# Altium PCB PCB_power.PcbDoc (part 1 of 2)
Units mil, origin at the board's own origin, x right, y up, seen from the top; angles counter-clockwise.
Board outline 6691.63 x 4180 mil, 4 copper layers (Top Layer, PWR Plane, GND Plane, Bottom Layer), stack 43.624 mil thick; 88 components, 48 nets, 304 pads, 150 vias.
Unrouted connection lines stored in the file: 3.
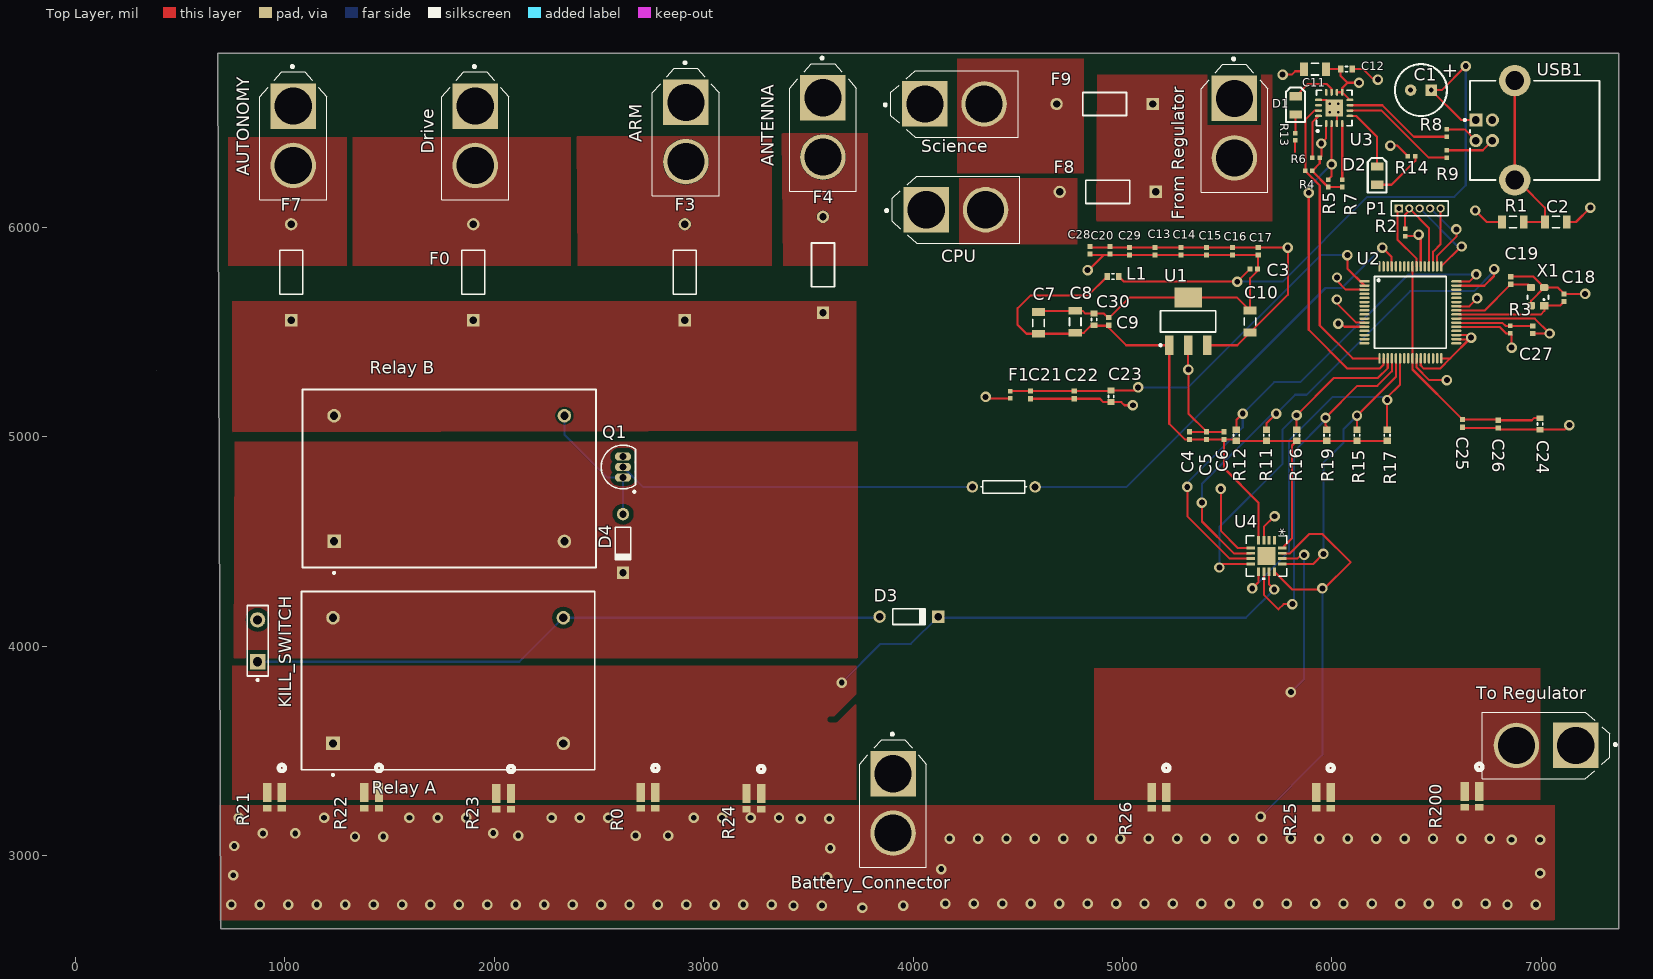
[diagram p0: Top Layer view]
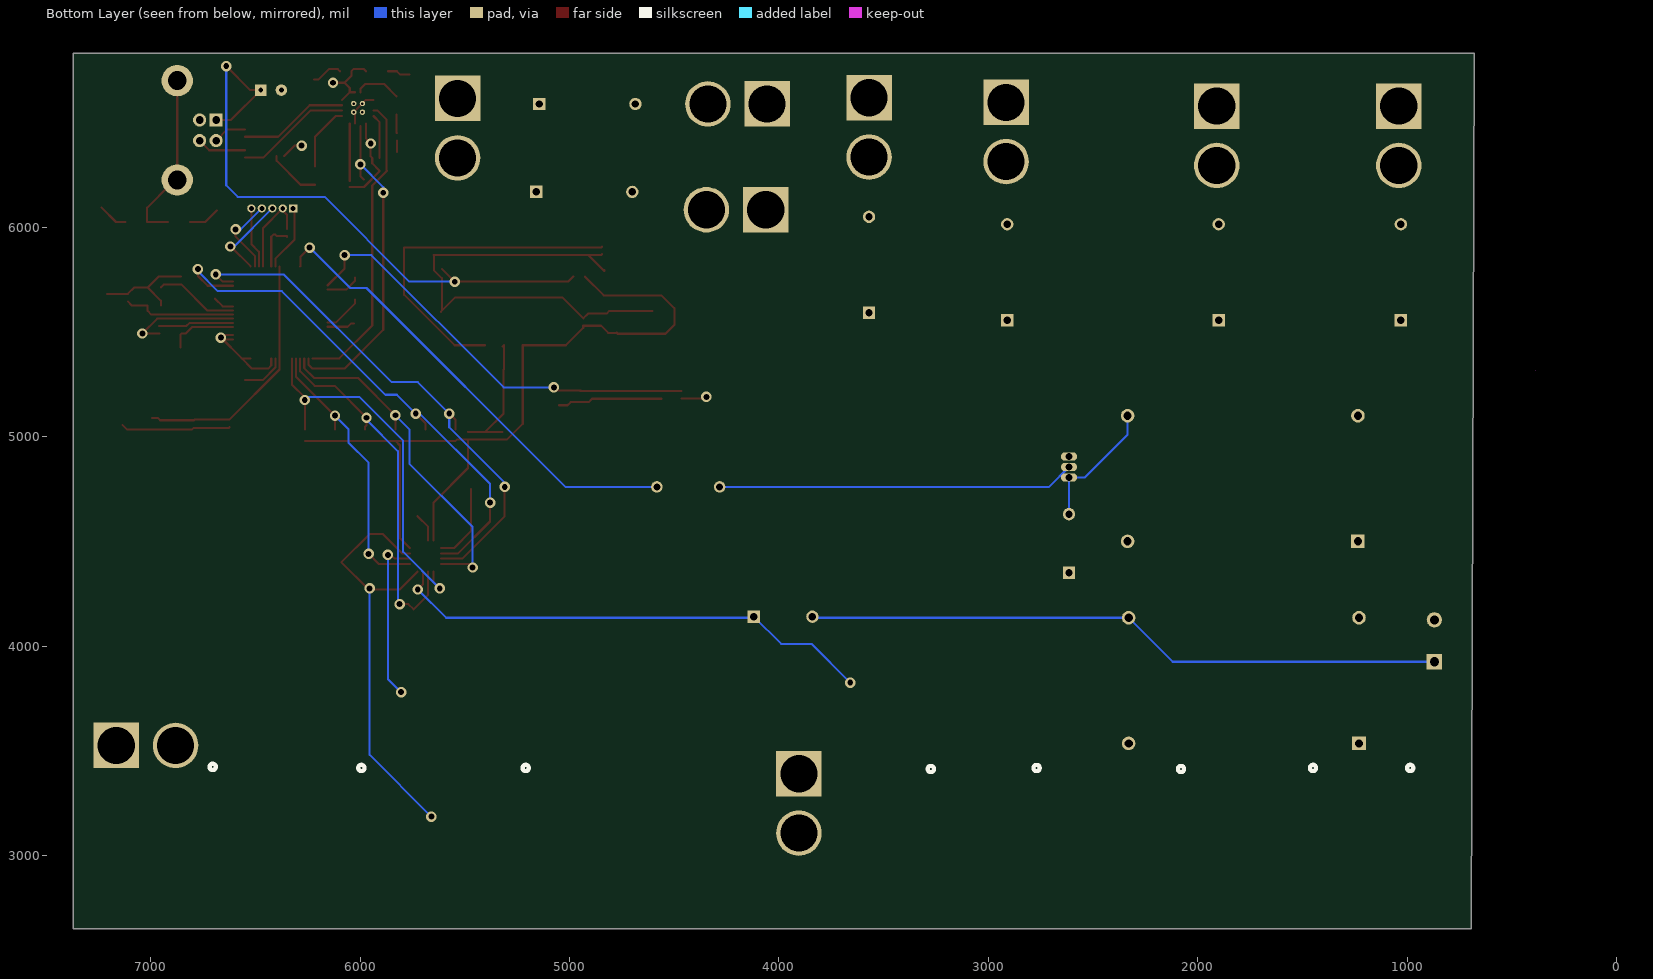
[diagram p1: Bottom Layer view, seen from below]
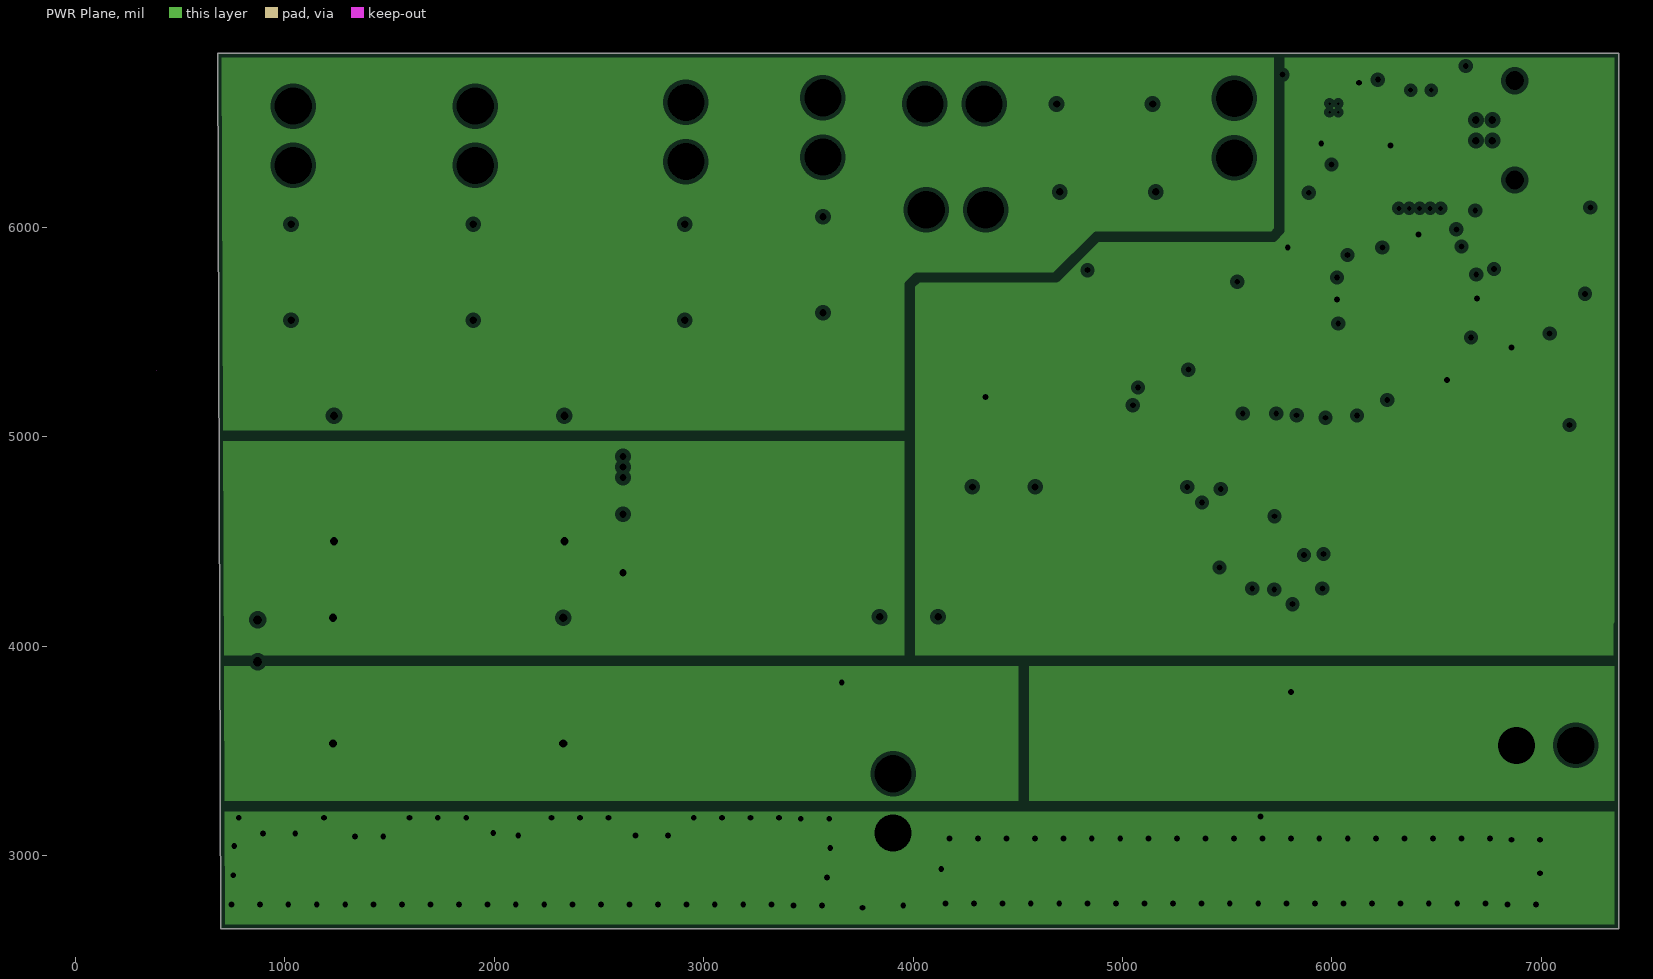
[diagram p2: PWR Plane, clearances drawn from the general rule]
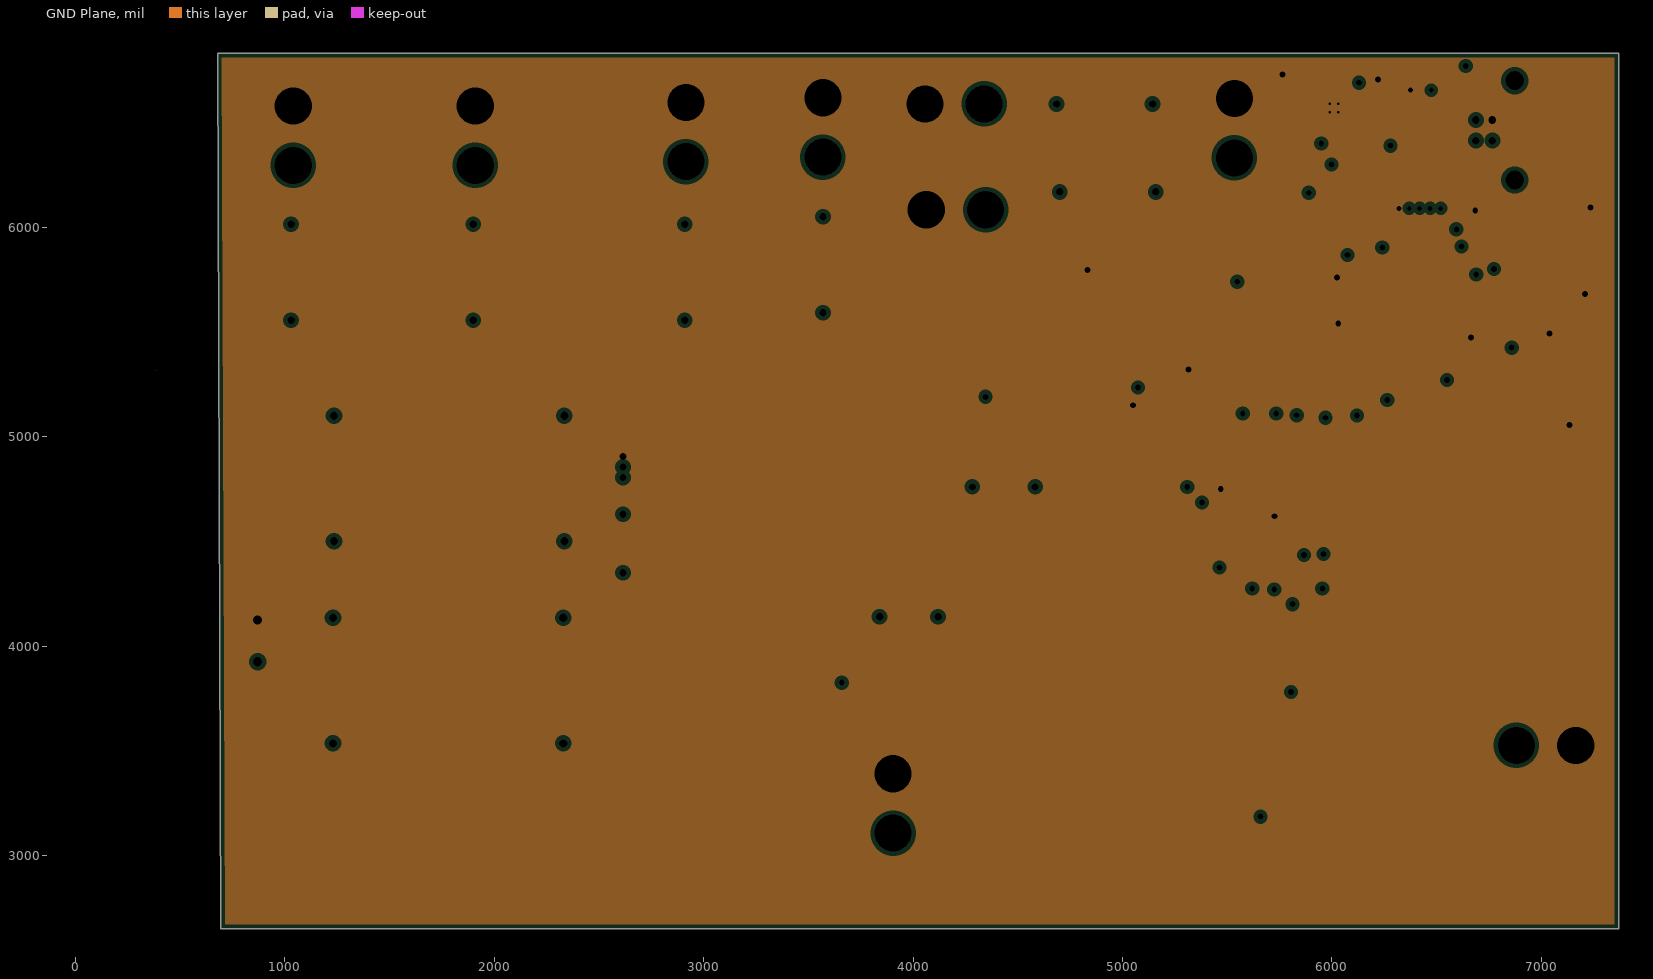
[diagram p3: GND Plane, clearances drawn from the general rule]
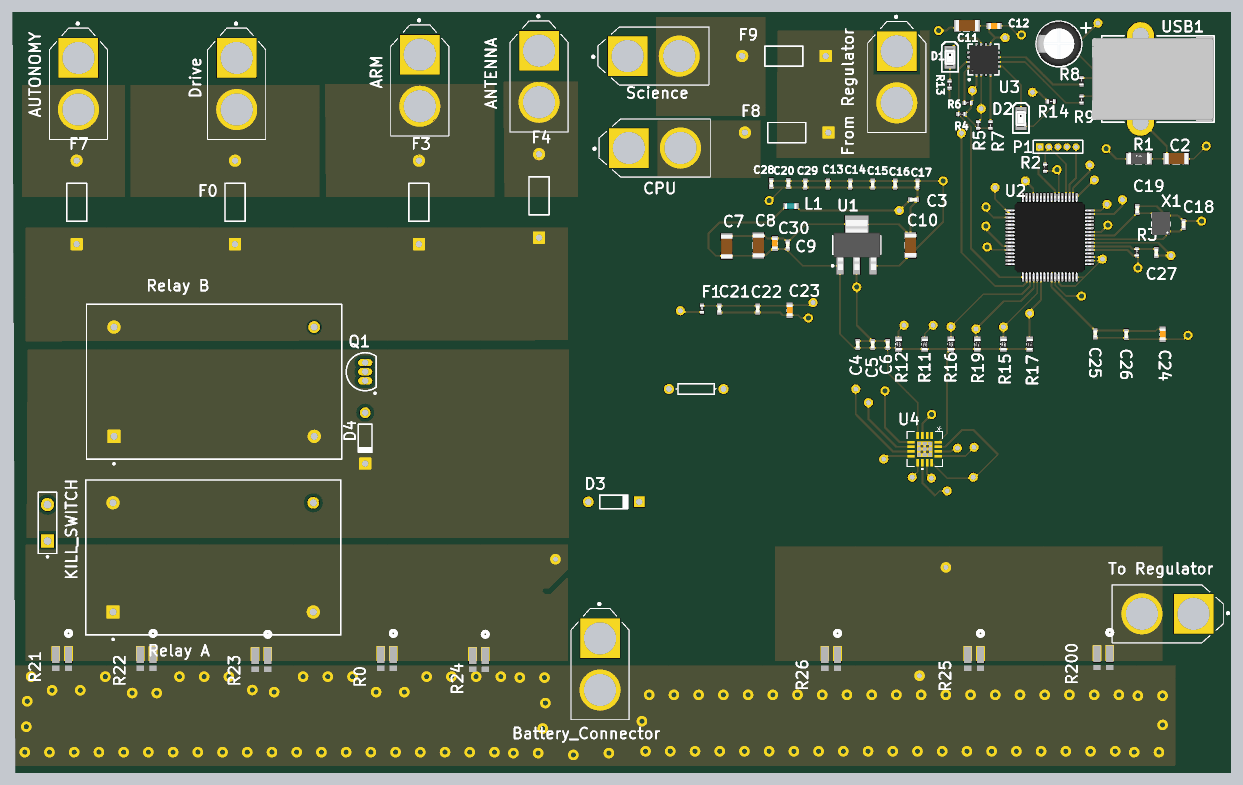
[diagram p4: 3D render of the assembled board from above, using the file's embedded part models]

## Layer stack, top to bottom
Top Solder: solder mask 0.4, Solder Resist, Dk 3.5
Top Layer: signal copper 2.7559
Dielectric 1: dielectric 12.6, FR-4, Dk 4.8
PWR Plane: plane copper 2.7559, net (Multiple Nets)
Dielectric 2: dielectric 10, Dk 4.2
GND Plane: plane copper 2.7559, net GND
Dielectric 3: dielectric 10, Dk 4.2
Bottom Layer: signal copper 2.7559
Bottom Solder: solder mask 0.4, Solder Resist, Dk 3.5

## Board outline
678.37,6830 7370,6830 7370,2650 693.44,2650
cut-out: 385,5315
cut-out: 8064.41,6636.2
cut-out: 5920,935

## Design rules (kind name [scope] priority, off if disabled: settings)
Clearance Clearance_5 [InNamedPolygon('Top Layer-IN-1')] p1: gap=10 ignorepadtopadclearanceinfootprint=FALSE
Clearance Clearance_4 [InNamedPolygon('Top Layer-RELAY_B')] p2: gap=10 ignorepadtopadclearanceinfootprint=FALSE except(0: Arc-Hole Track-Hole SMDPad-Hole THPad-Hole Via-Hole Fill-Hole Poly-Hole Region-Hole Text-Hole)
Clearance Clearance_3 [InNamedPolygon('Top Layer-IN-1')] p3: gap=10 ignorepadtopadclearanceinfootprint=FALSE
Clearance Clearance_2 [InNamedPolygon('Top Layer-12V')] p4: gap=20 ignorepadtopadclearanceinfootprint=FALSE
Clearance Clearance_1 [InNamedPolygon('Top Layer-RELAY_A')] p5: gap=19.68 ignorepadtopadclearanceinfootprint=FALSE
Clearance [All] p6 off: gap=7.87 ignorepadtopadclearanceinfootprint=FALSE
PlaneClearance [All] p1: clearance=20
PlaneConnect [All] p1: planeconnectstyle=Relief reliefexpansion=20 reliefentries=4 reliefconductorwidth=10 reliefairgap=10
PolygonConnect [All] p1: connectstyle=Direct reliefconductorwidth=10 reliefentries=4 polygonreliefangle="90 Angle" airgapwidth=10
RoutingVias [All] p1: holewidth=28 width=50 viastyle="Through Hole" minholewidth=28 minwidth=50 maxholewidth=28 maxwidth=50
SolderMaskExpansion [All] p1: expansion=4
Width [All] p1: maxlimit=10 minlimit=10 preferedwidth=10
28 further rules are at their usual default settings.

## Components (designator, comment, footprint, x,y, rotation, side; value= is the part's Value field where it differs from the comment)
ANTENNA "XT60-M" AMASS_XT60-M 3570,6476.73 r270 top
ARM "XT60-M" AMASS_XT60-M 2915,6455 r270 top
AUTONOMY "XT60-M" AMASS_XT60-M 1040,6436.73 r270 top
Battery_Connector "XT60-M" AMASS_XT60-M 3905,3248.27 r270 top
C1 "100uF" CapAlu6.3mmx12.5mm 6425.79,6655 r0 top
C2 "10nF" CAP_1206 7070,6025 r180 top
C3 "10nF" CAP_0402_M 5626.89,5800 r180 top
C4 "100nF" CAP_0402_M 5320,5005 r270 top
C5 "2.2uF" CAP_0402_M 5402.46,5005 r270 top
C6 "2.2uF" CAP_0402_M 5485,5005 r270 top
C7 "100uF" CAP_1206 4600,5543.7 r90 top
C8 "100uF" CAP_1206 4775,5548.7 r90 top
C9 "1uF" CAP_0402_M 4935,5550 r270 top
C10 "100uF" CAP_1206 5610,5550 r90 top
C11 "100uF" CAP_1206 5920,6755 r180 top
C12 "10uF" CAP_0603 6070,6755 r0 top
C13 "10nF" CAP_0402_M 5156.23,5885 r90 top
C14 "100nF" CAP_0402_M 5279.34,5885 r90 top
C15 "100nF" CAP_0402_M 5402.46,5885 r90 top
C16 "10nF" CAP_0402_M 5525.57,5885 r90 top
C17 "100nF" CAP_0402_M 5648.68,5885 r90 top
C18 "13pF" CAP_0402_M 7110,5663.86 r270 top
C19 "13pF" CAP_0402_M 6855,5745.75 r270 top
C20 "100nF" CAP_0402_M 4940,5890 r90 top
C21 "10nF" CAP_0402_M 4560.28,5199.01 r90 top
C22 "100nF" CAP_0402_M 4770.28,5199.01 r90 top
C23 "10uF" CAP_0603 4946.45,5192.56 r90 top
C24 "2.2uF" CAP_0603 6995,5060.71 r90 top
C25 "1uF" CAP_0402_M 6625,5063.15 r90 top
C26 "100nF" CAP_0402_M 6795,5060.04 r90 top
C27 "100nF" CAP_0402_M 6960,5510.75 r90 top
C28 "100nF" CAP_0402_M 4845,5890 r90 top
C29 "100nF" CAP_0402_M 5033.11,5885 r90 top
C30 "100nF" CAP_0603 4865,5560 r270 top
CPU "XT60-M" AMASS_XT60-M 4205,6083.7 r0 top
D1 "Led Red" "TOPLED 0805" 5827.16,6582.17 r90 top
D2 "Led Red" "TOPLED 0805" 6216.61,6246.5 r90 top
D3 "Diode 1N4148" DO-35 3980.24,4140 r0 top
D4 "Diode 1N4148" DO-35 2615,4490 r270 top
Drive "XT60-M" AMASS_XT60-M 1909.3,6436.73 r270 top
F0 "50A" PIN-W2/E2.8 1900,5785 r90 top
F1 "550mA" RES_0402_M 4465,5200 r90 top
F3 "50A" PIN-W2/E2.8 2910,5785 r90 top
F4 "15A" PIN-W2/E2.8 3570,5820.67 r90 top
F7 "25A" PIN-W2/E2.8 1030,5785 r90 top
F8 "6 A" PIN-W2/E2.8 4930,6168.7 r180 top
F9 "20 A" PIN-W2/E2.8 4915,6588.7 r180 top
"From Regulator" "XT60-M" AMASS_XT60-M 5535,6473.27 r270 top
KILL_SWITCH "SW-PB" SPST-2 870,4025 r90 top
L1 "200R" IND_0603 4955,5765 r180 top
P1 "MHDR1X5" MHDR1X5 6320,6090 r0 top
Q1 "NPN" TO-226-AA 2615,4855 r0 top
R0 "WSK06125L000FEA" RES_WSK0612_VIS 2769.68,3225 r270 top
R1 "1M" RES_1206 6865,6025 r0 top
R2 "10k" RES_0402_M 6350,5975 r90 top
R3 "10k" RES_0402_M 6853.11,5511.14 r90 top
R4 "10k" RES_0402_M 5890,6270 r0 top
R5 "10k" RES_0402_M 5982.16,6210 r270 top
R6 "10k" RES_0402_M 5925,6331.54 r0 top
R7 "10k" RES_0402_M 6050,6210 r270 top
R8 "27" RES_0402_M 6550,6450 r270 top
R9 "27" RES_0402_M 6550,6350 r270 top
R11 "10k" RES_0603 5688.28,5006.57 r90 top
R12 "10k" RES_0603 5544.22,5006.58 r90 top
R13 "120" RES_0402_M 5825,6432.28 r270 top
R14 "120" RES_0402_M 6381.61,6339.8 r180 top
R15 "10k" RES_0603 6120.44,5006.57 r90 top
R16 "10k" RES_0603 5832.33,5006.57 r90 top
R17 "10k" RES_0603 6264.49,5006.57 r90 top
R19 "10k" RES_0603 5976.38,5006.57 r90 top
R21 "WSK06125L000FEA" RES_WSK0612_VIS 985.48,3225.16 r270 top
R22 "WSK06125L000FEA" RES_WSK0612_VIS 1449.69,3225.16 r270 top
R23 "WSK06125L000FEA" RES_WSK0612_VIS 2080,3220.16 r270 top
R24 "WSK06125L000FEA" RES_WSK0612_VIS 3274.69,3220.16 r270 top
R25 "WSK06125L000FEA" RES_WSK0612_VIS 5994.68,3225.16 r270 top
R26 "WSK06125L000FEA" RES_WSK0612_VIS 5209.69,3225.16 r270 top
R200 "WSK06125L000FEA" RES_WSK0612_VIS 6704.68,3230.16 r270 top
"Relay A" "J115F11AH24VDCS61.5U" MODULE4 1780,3835 r0 top
"Relay B" "J115F11AH24VDCS61.5U" MODULE4 1785,4800 r0 top
Science "XT60-M" AMASS_XT60-M 4198.27,6588.7 r0 top
"To Regulator" "XT60-M" AMASS_XT60-M 7023.27,3525 r180 top
U1 "MCP1825S-3302E/DB" SOT230P700X180-4N 5314.17,5550.75 r90 top
U2 "TM4C123GH6PMI" TSQFP50P1200X1200X120-64N 6227.87,5813.07 r0 top
U3 "FT230XQ" QFN65P400X400X80_HS-17N 6011.61,6569.8 r90 top
U4 "INA3221AQRGVRQ1" RGV16_2P16X2P16_ 5688.28,4430 r270 top
USB1 "USB type-B jack" USB2.5-2H4E 6727.84,6462.99 r0 top
X1 "CRYSTAL 16MHZ" CRYSTAL_3.2x2.5 7015,5625.75 r180 top
? "" AXIAL-0.3 4433.35,4760 r180 top value=10K

## Footprints (in the part's own frame and the unit in brackets; to place one, negate y for a bottom-side part, rotate by r counter-clockwise, add the part's x,y. Pads: shape width x height; smd on the part's side, far side on the other; paste and mask are expansions set on the pad)
AMASS_XT60-M [mm]
  rect 5.516x5.516 hole 4.5: 1(-3.6,0)
  round 5.516 hole 4.5: 2(3.6,0)
  silkscreen extent -8.55,-4.05 7.75,4.05
AXIAL-0.3 [mm] "Axial Device, Thru-Hole; 2 Leads; 0.3 in Pin Spacing"
  round 1.4 hole 0.85: 1(-3.81,0) 2(3.81,0)
  silkscreen extent -2.77,-0.76 2.77,0.76
CAP_0402_M [mm] "Chip Capacitor, 2-Leads, Body 1.00x0.50mm, IPC Medium Density"
  rect 0.62x0.62 smd: 1(-0.46,0) 2(0.46,0)
  body extent -0.5,-0.26 0.5,0.27, height 0.36
CAP_0603 [mm] "Chip Capacitor, 2-Leads, Body 1,6x0,8mm, IPC High Density"
  rect 0.7x0.85 smd: 1(-0.7,0) 2(0.7,0)
  silkscreen extent -0.15,-0.33 0.15,0.33, body extent -0.8,-0.42 0.8,0.38, height 0.7
CAP_1206 [mm] "Chip Capacitor, 2-Leads, Body 3,1x1,6mm, IPC High Density"
  rect 0.95x1.6 smd: 1(-1.325,0) 2(1.325,0)
  silkscreen extent -0.45,-0.7 0.45,0.7, body extent -1.63,-0.82 1.57,0.78, height 1.6
CapAlu6.3mmx12.5mm [mm] "Capacitor Aluminum 6.3mm OD"
  rect 1.4x1.4 hole 0.6: 1(1.25,0)
  round 1.4 hole 0.6: 2(-1.25,0)
  silkscreen extent -3.15,-3.15 3.15,3.15, body extent -3.15,-3.11 3.15,3.19, height 12
CRYSTAL_3.2x2.5 [mm]
  rect 1x0.9 smd: 1(0,0)
  rrect50% 1x0.9 smd: 2(0,-2.2) 3(1.6,-2.2) 4(1.6,0)
  silkscreen extent -0.51,-1.27 2.03,-0.69, body extent -0.5,-2.7 2,0.5, height 0.93
DO-35 [mm] "Diode, Axial; Body 3.8 x 1.9 mm (LxDia. max), Lead Dia. 0.53 mm (max)"
  round 1.5 hole 0.9: 1(-3.55,0)
  rect 1.5x1.5 hole 0.9: 2(3.55,0)
  silkscreen extent -1.95,-0.95 2.05,0.95
IND_0603 [mm]
  rect 0.7x0.85 smd: 1(-0.7,0) 2(0.7,0)
  silkscreen extent -0.15,-0.32 0.15,0.32, body extent -0.74,-0.4 0.86,0.4, height 0.95
MHDR1X5 [mm] "Connector; Header; 5 Position"
  rect 1x1 hole 0.6: 1(0,0)
  round 1 hole 0.6: 2(1.27,0) 3(2.54,0) 4(3.81,0) 5(5.08,0)
  silkscreen extent -0.9,-0.9 5.98,0.9
MODULE4 [mm] "DIP; 4 Round Pins; Row Space 27.94 mm; Pitch 15.24 mm"
  rect 1.65x1.65 hole 1: 1(-13.97,-7.62)
  round 1.65 hole 1: 2(-13.97,7.62) 3(13.97,-7.62) 4(13.97,7.62)
  silkscreen extent -17.8,-11.57 17.8,10.8, body extent -17.8,-10.8 17.8,10.8, height 14
PIN-W2/E2.8 [mm] "Thru-Hole; 2 Leads"
  rect 1.5x1.5 hole 0.9: 1(-5.825,0)
  round 1.5 hole 0.9: 2(5.825,0)
  silkscreen extent -2.65,-1.4 2.65,1.4
QFN65P400X400X80_HS-17N [mm] "QFN, 16-Leads, Body 4.00x4.00mm, Pitch 0.65mm, Thermal Pad 2.08x2.08mm, IPC Medium Density"
  oval 0.85x0.3 smd: 1(-1.9,0.975) 2(-1.9,0.325) 3(-1.9,-0.325) 4(-1.9,-0.975) 9(1.9,-0.975) 10(1.9,-0.325) 11(1.9,0.325) 12(1.9,0.975)
  oval 0.3x0.85 smd: 5(-0.975,-1.9) 6(-0.325,-1.9) 7(0.325,-1.9) 8(0.975,-1.9) 13(0.975,1.9) 14(0.325,1.9) 15(-0.325,1.9) 16(-0.975,1.9)
  round 0.66 hole 0.305: 17(-0.516,-0.493) 17(-0.516,0.567) 17(0.538,-0.493) 17(0.538,0.567)
  rect 2.08x2.08 smd: 17(0,0)
  silkscreen extent -2.92,-2.15 2.15,2.15, body extent -2,-2 2,2, height 0.92
RES_0402_M [mm] "Chip Resistor, 2-Leads, Body 1.00x0.50mm, IPC Medium Density"
  rect 0.55x0.55 smd: 1(-0.45,0) 2(0.45,0)
  body extent -0.52,-0.3 0.52,0.3, height 0.34
RES_0603 [mm] "Chip Resistor, 2-Leads, Body 1,6x0,8mm, IPC High Density"
  rect 0.75x0.9 smd: 1(-0.675,0) 2(0.675,0)
  silkscreen extent -0.1,-0.35 0.1,0.35, body extent -0.82,-0.48 0.72,0.38, height 0.45
RES_1206 [mm] "Chip Resistor 2-Leads, Body 3,1x1,6mm, IPC High Density"
  rect 0.95x1.6 smd: 1(-1.325,0) 2(1.325,0)
  silkscreen extent -0.45,-0.7 0.45,0.7, body extent -1.59,-0.76 1.61,0.84, height 1
RES_WSK0612_VIS [mil]
  rect 30x40 smd paste+0 mask+0: 1(0,0) 2(0,-69.68)
  rect 90x40 smd: 3(-74.84,0) 4(-74.84,-69.68)
  silkscreen extent -207,-15 -178,15, body extent 0,0 10,10, height 10
RGV16_2P16X2P16_ [mm]
  rect 1x0.35 smd paste-0.175 mask+0: 1(-1.9,0.975) 2(-1.9,0.325) 3(-1.9,-0.325) 4(-1.9,-0.975) 9(1.9,-0.975) 10(1.9,-0.325) 11(1.9,0.325) 12(1.9,0.975)
  rect 0.35x1 smd paste-0.175 mask+0: 5(-0.975,-1.9) 6(-0.325,-1.9) 7(0.325,-1.9) 8(0.975,-1.9) 13(0.975,1.9) 14(0.325,1.9) 15(-0.325,1.9) 16(-0.975,1.9)
  rect 2.16x2.16 smd paste-1.067 mask-1.067: 17(0,0)
  silkscreen extent -2.46,-2.46 2.91,2.46, body extent 0,0 0.25,0.25, height 0.25
SOT230P700X180-4N [mm] "SOT223, 4-Leads, Body 6,7x7,3mm (max), Pitch 2,30mm, IPC Medium Density"
  rect 2.4x1 smd: 1(-2.9,2.3) 2(-2.9,0) 3(-2.9,-2.3)
  rect 2.4x3.3 smd: 4(2.9,0)
  silkscreen extent -3.02,-3.35 1.3,3.47, body extent -3.5,-3.3 3.5,3.2, height 1.69
SPST-2 [mm] "Switch; 2 Leads"
  rect 1.85x1.85 hole 1.1: 1(-2.54,0)
  round 1.85 hole 1.1: 2(2.54,0)
  silkscreen extent -4.89,-1.27 4.28,1.27
TO-226-AA [mm] "TO, Flat Index; 3 In-Line, Axial Leads; Body Dia. 4.8mm; Leads 0.55 x 0.51 mm (max)"
  oval 2x1 hole 0.9: 1(0,-1.27) 2(0,0) 3(0,1.27)
  silkscreen extent -2.65,-3.13 1.52,2.65, body extent -2.65,-2.66 1.52,2.66, height 5.33
"TOPLED 0805" [mm]
  rect 1x1.5 smd: 1(-1.1,0) 2(1.1,0)
  silkscreen extent -2.03,-1.14 2.16,1.14, body extent -1.2,-0.74 1.2,0.76, height 1.45
TSQFP50P1200X1200X120-64N [mm] "TSQFP, 64-Leads, Body 12,0x12,0mm (max), Pitch 0,50mm, IPC Medium Density"
  rect 1.25x0.3 smd: 1(-1.825,-1.825)
  oval 1.25x0.3 smd: 2(-1.825,-2.325) 3(-1.825,-2.825) 4(-1.825,-3.325) 5(-1.825,-3.825) 6(-1.825,-4.325) 7(-1.825,-4.825) 8(-1.825,-5.325) 9(-1.825,-5.825) 10(-1.825,-6.325) 11(-1.825,-6.825) 12(-1.825,-7.325) 13(-1.825,-7.825) 14(-1.825,-8.325) 15(-1.825,-8.825) 16(-1.825,-9.325) 33(9.325,-9.325) 34(9.325,-8.825) 35(9.325,-8.325) 36(9.325,-7.825) 37(9.325,-7.325) 38(9.325,-6.825) 39(9.325,-6.325) 40(9.325,-5.825) 41(9.325,-5.325) 42(9.325,-4.825) 43(9.325,-4.325) 44(9.325,-3.825) 45(9.325,-3.325) 46(9.325,-2.825) 47(9.325,-2.325) 48(9.325,-1.825)
  oval 0.3x1.25 smd: 17(0,-11.15) 18(0.5,-11.15) 19(1,-11.15) 20(1.5,-11.15) 21(2,-11.15) 22(2.5,-11.15) 23(3,-11.15) 24(3.5,-11.15) 25(4,-11.15) 26(4.5,-11.15) 27(5,-11.15) 28(5.5,-11.15) 29(6,-11.15) 30(6.5,-11.15) 31(7,-11.15) 32(7.5,-11.15) 49(7.5,0) 50(7,0) 51(6.5,0) 52(6,0) 53(5.5,0) 54(5,0) 55(4.5,0) 56(4,0) 57(3.5,0) 58(3,0) 59(2.5,0) 60(2,0) 61(1.5,0) 62(1,0) 63(0.5,0) 64(0,0)
  silkscreen extent -0.6,-9.92 8.1,-1.23, body extent -2.05,-11.38 9.53,0.2, height 1
USB2.5-2H4E [mm] "Connector; USB1.1, Type B, Thru-Hole; 4 Position; Right Angle"
  rect 1.6x1.6 hole 0.92: 1(-1,1.25)
  round 1.6 hole 0.92: 2(-1,-1.25) 3(1,-1.25) 4(1,1.25)
  round 3.8 hole 2.3: 5(3.71,6.02) 6(3.71,-6.02)
  silkscreen extent -2.47,-6.02 13.99,6.02, body extent -3.03,-6 13.97,6, height 10.9

## Part data
ANTENNA ARM AUTONOMY Battery_Connector CPU Drive "From Regulator" Science "To Regulator": "Plug; DC supply; XT60; male; PIN: 2; for cable; soldered; 30A; 500V", Package="Package Analog Devices", Availability=Unavailable, MF=AMASS, MP=XT60-M, Price=None, SnapEDA_Link=https://www.snapeda.com/parts/XT60-M/AMASS/view-part/2883912/?ref=snap
C1: library part 100uF_35v_6.3x12.5, "Capacitor 35v 100uF 6.3mm", Capacitance=100µF, ESR (Equivalent Series Resistance)=-, Lifetime @ Temp.="5000 Hrs @ 105°C", Manufacturer=Nichicon, Manufacturer Part Number=UHV1V101MED, Operating Temperature="-40°C ~ 105°C", Package / Case="Radial, Can", Ripple Current="220mA @ 120Hz", Supplier Part Number 1=493-13394-ND, Tolerance=±20%, Voltage Rating=35V, Applications="General Purpose", Category=Capacitors, ComponentLink1Description=http://nichicon-us.com/english/products/pdfs/e-uhv.pdf, ComponentLink1URL=http://nichicon-us.com/english/products/pdfs/e-uhv.pdf, Height - Seated (Max)="0.492\" (12.50mm)", Impedance="100 mOhm", Lead Spacing="0.098\" (2.50mm)", Mounting Type="Through Hole", Packaging=Bulk, Polarization=Polar, Pricing 1="1=0.46, 10=0.32, 25=0.262, 50=0.224, 100=0.1919, 250=0.15992, 500=0.14394, 1000=0.12155, 2500=0.11515 (CAD)", RoHS="RoHS Compliant", Size / Dimension="0.248\" Dia (6.30mm)", Stock 1=5561, Supplier 1=Digi-Key, Surface Mount Land Size=-
C2: library part 10nF_500V_1206, "CAP CER 10000PF 500V X7R 1206", Capacitance=10000pF, Manufacturer="Samsung Electro-Mechanics America, Inc", Manufacturer Part Number=CL31B103KGFNNNE, Operating Temperature="-55°C ~ 125°C", Package / Case="1206 (3216 Metric)", Ratings=-, Supplier Part Number 1=1276-3076-1-ND, Temperature Coefficient=X7R, Tolerance=±10%, Voltage - Rated=500V, Applications="General Purpose", Category=Capacitors, ComponentLink1Description=http://www.samsungsem.com/kr/front/downloadcms.do?path=/kr/support/product-search/mlcc/__icsFiles/afieldfile/2014/11/05&fileName=S_CL31B103KGFNNNE.pdf, ComponentLink1URL=http://www.samsungsem.com/kr/front/downloadcms.do?path=/kr/support/product-search/mlcc/__icsFiles/afieldfile/2014/11/05&fileName=S_CL31B103KGFNNNE.pdf, Features=-, Height - Seated (Max)=-, Lead Spacing=-, Lead Style=-, Mounting Type="Surface Mount, MLCC", Packaging="Cut Tape (CT)", Pricing 1="1=0.34, 10=0.28, 25=0.192, 100=0.1398, 500=0.09266, 1000=0.08216 (CAD)", RoHS="RoHS Compliant", Size / Dimension="0.126\" L x 0.063\" W (3.20mm x 1.60mm)", Stock 1=9075, Supplier 1=Digi-Key, Thickness (Max)="0.055\" (1.40mm)"
C3 C13 C16 C21: library part 10nF_50V_0402, "CAP CER 10000PF 50V 10% X7R 0402", Capacitance=10000pF, Manufacturer=Kemet, Manufacturer Part Number=C0402C103K5RACTU, Operating Temperature="-55°C ~ 125°C", Package / Case="0402 (1005 Metric)", Ratings=-, Supplier Part Number 1=399-3066-1-ND, Temperature Coefficient=X7R, Tolerance=±10%, Voltage - Rated=50V, Applications="General Purpose", Category=Capacitors, ComponentLink1Description=http://www.kemet.com/docfinder?Partnumber=C0402C103K5RACTU, ComponentLink1URL=http://www.kemet.com/docfinder?Partnumber=C0402C103K5RACTU, Features=-, Height - Seated (Max)=-, Lead Spacing=-, Lead Style=-, Mounting Type="Surface Mount, MLCC", Packaging="Cut Tape (CT)", Pricing 1="1=0.14, 10=0.037, 25=0.026, 50=0.0198, 100=0.0166, 250=0.01364, 1000=0.00893, 2500=0.00804, 5000=0.00744 (CAD)", RoHS="RoHS Compliant", Size / Dimension="0.039\" L x 0.020\" W (1.00mm x 0.50mm)", Stock 1=3556921, Supplier 1=Digi-Key, Thickness (Max)="0.022\" (0.55mm)"
C4 C14 C15 C17 C20 C22 C26 C27 C28 C29: library part 100nF_50V_0402, "CAP CER 100NF 50V 20% X5R 0402", Capacitance=0.1µF, Manufacturer="TDK Corporation", Manufacturer Part Number=C1005X5R1H104M050BB, Operating Temperature="-55°C ~ 85°C", Package / Case="0402 (1005 Metric)", Ratings=-, Supplier Part Number 1=445-5943-1-ND, Temperature Coefficient=X5R, Tolerance=±20%, Voltage - Rated=50V, Applications="General Purpose", Category=Capacitors, ComponentLink1Description=http://product.tdk.com/en/catalog/datasheets/mlcc_commercial_general_en.pdf, ComponentLink1URL=http://product.tdk.com/en/catalog/datasheets/mlcc_commercial_general_en.pdf, Features=-, Height - Seated (Max)=-, Lead Spacing=-, Lead Style=-, Mounting Type="Surface Mount, MLCC", Packaging="Cut Tape (CT)", Pricing 1="1=0.18, 10=0.122, 100=0.0579, 250=0.04872, 500=0.0408, 1000=0.03348, 5000=0.02831 (CAD)", RoHS="RoHS Compliant", Size / Dimension="0.039\" L x 0.020\" W (1.00mm x 0.50mm)", Stock 1=218263, Supplier 1=Digi-Key, Thickness (Max)="0.022\" (0.55mm)"
C5 C6: library part 2.2uF_10V_0402, "CAP CER 2.2UF 10V 20% X5R 0402", Capacitance=2.2µF, Manufacturer="Taiyo Yuden", Manufacturer Part Number=LMK105BJ225MV-F, Operating Temperature="-55°C ~ 85°C", Package / Case="0402 (1005 Metric)", Ratings=-, Supplier Part Number 1=587-3153-1-ND, Temperature Coefficient=X5R, Tolerance=±20%, Voltage - Rated=10V, Applications="General Purpose", Category=Capacitors, ComponentLink1Description=http://www.yuden.co.jp/ut/product/category/capacitor/LMK105BJ225MV-F.pdf, ComponentLink1URL=http://www.yuden.co.jp/ut/product/category/capacitor/LMK105BJ225MV-F.pdf, Features=-, Height - Seated (Max)=-, Lead Spacing=-, Lead Style=-, Mounting Type="Surface Mount, MLCC", Packaging="Cut Tape (CT)", Pricing 1="1=0.26, 10=0.173, 50=0.105, 100=0.0881, 250=0.07132, 500=0.0629, 1000=0.05348, 2500=0.04928, 5000=0.04509 (CAD)", RoHS="RoHS Compliant", Size / Dimension="0.039\" L x 0.020\" W (1.00mm x 0.50mm)", Stock 1=258065, Supplier 1=Digi-Key, Thickness (Max)="0.022\" (0.55mm)"
C7 C8 C10 C11: library part 100uF_6.3v_1206_X5R, "CAP CER 100UF 6.3V X5R 1206", Capacitance=100µF, Manufacturer="Murata Electronics North America", Manufacturer Part Number=GRM31CR60J107ME39L, Operating Temperature="-55°C ~ 85°C", Package / Case="1206 (3216 Metric)", Ratings=-, Supplier Part Number 1=490-4539-1-ND, Temperature Coefficient=X5R, Tolerance=±20%, Voltage - Rated=6.3V, Applications="General Purpose", Category=Capacitors, ComponentLink1Description=http://www.murata.com/~/media/webrenewal/support/library/catalog/products/capacitor/mlcc/c02e.pdf, ComponentLink1URL=http://www.murata.com/~/media/webrenewal/support/library/catalog/products/capacitor/mlcc/c02e.pdf, Features=-, Height - Seated (Max)=-, Lead Spacing=-, Lead Style=-, Mounting Type="Surface Mount, MLCC", Packaging="Cut Tape (CT)", Pricing 1="1=1.23, 10=1.048, 50=0.771, 100=0.6128, 250=0.51396, 500=0.46456, 1000=0.42502 (CAD)", RoHS="RoHS Compliant", Size / Dimension="0.126\" L x 0.063\" W (3.20mm x 1.60mm)", Stock 1=450179, Supplier 1=Digi-Key, Thickness (Max)="0.071\" (1.80mm)"
C9 C25: library part 1uF_25V_0402, "CAP CER 1UF 25V 10% X5R 0402", Capacitance=1µF, Manufacturer="TDK Corporation", Manufacturer Part Number=C1005X5R1E105K050BC, Operating Temperature="-55°C ~ 85°C", Package / Case="0402 (1005 Metric)", Ratings=-, Supplier Part Number 1=445-9066-1-ND, Temperature Coefficient=X5R, Tolerance=±10%, Voltage - Rated=25V, Applications="General Purpose", Category=Capacitors, ComponentLink1Description=http://product.tdk.com/en/catalog/datasheets/mlcc_commercial_general_en.pdf, ComponentLink1URL=http://product.tdk.com/en/catalog/datasheets/mlcc_commercial_general_en.pdf, Features=-, Height - Seated (Max)=-, Lead Spacing=-, Lead Style=-, Mounting Type="Surface Mount, MLCC", Packaging="Cut Tape (CT)", Pricing 1="1=0.27, 10=0.185, 100=0.0878, 250=0.074, 500=0.06196, 1000=0.05087, 5000=0.04301 (CAD)", RoHS="RoHS Compliant", Size / Dimension="0.039\" L x 0.020\" W (1.00mm x 0.50mm)", Stock 1=310467, Supplier 1=Digi-Key, Thickness (Max)="0.022\" (0.55mm)"
C12 C23: library part 10uF_10V_0603, "CAP CER 10UF 10V 20% X5R 0603", Capacitance=10µF, Manufacturer="Taiyo Yuden", Manufacturer Part Number=LMK107BBJ106MAHT, Operating Temperature="-55°C ~ 85°C", Package / Case="0603 (1608 Metric)", Ratings=AEC-Q200, Supplier Part Number 1=587-3412-1-ND, Temperature Coefficient=X5R, Tolerance=±20%, Voltage - Rated=10V, Applications=Automotive, Category=Capacitors, ComponentLink1Description=http://www.yuden.co.jp/productdata/catalog/en/mlcc01_hq_e.pdf, ComponentLink1URL=http://www.yuden.co.jp/productdata/catalog/en/mlcc01_hq_e.pdf, Features=-, Height - Seated (Max)=-, Lead Spacing=-, Lead Style=-, Mounting Type="Surface Mount, MLCC", Packaging="Cut Tape (CT)", Pricing 1="1=0.5, 10=0.437, 50=0.266, 100=0.2189, 250=0.17516, 500=0.15952, 1000=0.14107 (CAD)", RoHS="RoHS Compliant", Size / Dimension="0.063\" L x 0.031\" W (1.60mm x 0.80mm)", Stock 1=90195, Supplier 1=Digi-Key, Thickness (Max)="0.035\" (0.90mm)"
C18 C19: library part 13pF_50V_0402, "CAP CER 13PF 50V 5% NP0 0402", Manufacturer="Samsung Electro-Mechanics America, Inc", Manufacturer Part Number=CL05C130JB5NNNC, Operating Temperature="-55°C ~ 125°C", Package / Case="0402 (1005 Metric)", Ratings=-, Supplier Part Number 1=1276-1642-1-ND, Temperature Coefficient="C0G, NP0", Tolerance=±5%, Voltage - Rated=50V, Applications="General Purpose", Capacitance=13pF, Category=Capacitors, ComponentLink1Description=http://www.samsungsem.com/kr/front/downloadcms.do?path=/kr/support/product-search/mlcc/__icsFiles/afieldfile/2014/11/05&fileName=S_CL05C130JB5NNNC.pdf, ComponentLink1URL=http://www.samsungsem.com/kr/front/downloadcms.do?path=/kr/support/product-search/mlcc/__icsFiles/afieldfile/2014/11/05&fileName=S_CL05C130JB5NNNC.pdf, Features=-, Height - Seated (Max)=-, Lead Spacing=-, Lead Style=-, Mounting Type="Surface Mount, MLCC", Packaging="Cut Tape (CT)", Pricing 1="1=0.14, 10=0.064, 25=0.0448, 100=0.0291, 500=0.02032, 1000=0.01583, 2500=0.01425, 5000=0.01319 (CAD)", RoHS="RoHS Compliant", Size / Dimension="0.039\" L x 0.020\" W (1.00mm x 0.50mm)", Stock 1=16490, Supplier 1=Digi-Key, Thickness (Max)="0.022\" (0.55mm)"
C24: library part 2.2uF_35V_0603, "CAP CER 2.2UF 35V 10% X5R 0603", Capacitance=2.2µF, Manufacturer="Murata Electronics North America", Manufacturer Part Number=GRM188R6YA225KA12D, Operating Temperature="-55°C ~ 85°C", Package / Case="0603 (1608 Metric)", Ratings=-, Supplier Part Number 1=490-7204-1-ND, Temperature Coefficient=X5R, Tolerance=±10%, Voltage - Rated=35V, Applications="General Purpose", Category=Capacitors, ComponentLink1Description=http://www.murata.com/~/media/webrenewal/support/library/catalog/products/capacitor/mlcc/c02e.ashx, ComponentLink1URL=http://www.murata.com/~/media/webrenewal/support/library/catalog/products/capacitor/mlcc/c02e.ashx, Features=-, Height - Seated (Max)=-, Lead Spacing=-, Lead Style=-, Mounting Type="Surface Mount, MLCC", Packaging="Cut Tape (CT)", Pricing 1="1=0.31, 10=0.214, 50=0.1298, 100=0.109, 250=0.08832, 500=0.07792, 1000=0.06624 (CAD)", RoHS="RoHS Compliant", Size / Dimension="0.063\" L x 0.031\" W (1.60mm x 0.80mm)", Stock 1=55248, Supplier 1=Digi-Key, Thickness (Max)="0.031\" (0.80mm)"
C30: library part 100nF_50V_0603, "CAP CER 0.1UF 50V 20% X7R 0603", Capacitance=0.1µF, Manufacturer=Kemet, Manufacturer Part Number=C0603C104M5RACTU, Operating Temperature="-55°C ~ 125°C", Package / Case="0603 (1608 Metric)", Ratings=-, Supplier Part Number 1=399-7845-1-ND, Temperature Coefficient=X7R, Tolerance=±20%, Voltage - Rated=50V, Applications="General Purpose", Category=Capacitors, ComponentLink1Description=http://www.kemet.com/docfinder?Partnumber=C0603C104M5RACTU, ComponentLink1URL=http://www.kemet.com/docfinder?Partnumber=C0603C104M5RACTU, Features=-, Height - Seated (Max)=-, Lead Spacing=-, Lead Style=-, Mounting Type="Surface Mount, MLCC", Packaging="Cut Tape (CT)", Pricing 1="1=0.13, 10=0.034, 25=0.024, 50=0.0184, 100=0.0155, 250=0.01268, 1000=0.0083 (CAD)", RoHS="RoHS Compliant", Size / Dimension="0.063\" L x 0.031\" W (1.60mm x 0.80mm)", Stock 1=171007, Supplier 1=Digi-Key, Thickness (Max)="0.034\" (0.87mm)"
D1 D2: library part "TOPLED 0803", "LED TOPLED 630NM SUP RED CLR SMD", Color=Red, Current - Test=2mA, Luminous Flux @ Current - Test="25 mlm", Manufacturer="OSRAM Opto Semiconductors Inc", Manufacturer Part Number="LS M67K-H2L1-1-Z", Millicandela Rating=8.78mcd, Package / Case="2-SMD, J-Lead", Supplier Part Number 1=475-2510-1-ND, Voltage - Forward (Vf) (Typ)=1.8V, Category=Optoelectronics, ComponentLink1Description=http://media.digikey.com/pdf/Data%20Sheets/Osram%20PDFs/LS,LO,LY_M67K.pdf, ComponentLink1URL=http://media.digikey.com/pdf/Data%20Sheets/Osram%20PDFs/LS,LO,LY_M67K.pdf, Height=1.30mm, Lens Style/Size="Rectangle with Flat Top, 1.5mm x 1mm", Lens Type=Clear, Mounting Type="Surface Mount", Packaging="Cut Tape (CT)", Pricing 1="1=0.19, 10=0.162, 100=0.1295, 250=0.11328, 500=0.10354 (CAD)", RoHS="RoHS Compliant", Size / Dimension="2.20mm L x 1.40mm W", Stock 1=23262, Supplier 1=Digi-Key, Viewing Angle=120°, Wavelength - Dominant=630nm, Wavelength - Peak=643nm
D3 D4: "High Conductance Fast Diode", Code_JEDEC=DO-204-AH, ComponentLink1Description="Manufacturer Link", ComponentLink1URL=http://www.fairchildsemi.com/, ComponentLink2Description=Datasheet, ComponentLink2URL=http://www.fairchildsemi.com/ds/1N%2F1N4148.pdf, DatasheetVersion=1997, LatestRevisionDate=17-Jul-2002, LatestRevisionNote="Re-released for DXP Platform.", PackageDescription="Diode, Axial; Body 3.8 x 1.9 mm (LxDia. max), Lead Dia. 0.53 mm (max)", PackageReference=DO-35, Published=8-Jun-2000, Publisher="Altium Limited"
F0 F3 F4 F7 F8 F9: library part "Fuse 1", "Fuse", LatestRevisionDate=17-Jul-2002, LatestRevisionNote="Re-released for DXP Platform.", PackageDescription="Thru-Hole; 2 Leads", PackageReference=PIN-W2/E2.8, Published=8-Jun-2000, Publisher="Altium Limited"
F1: library part 40O_550mA_0402, "FERRITE CHIP 40 OHM 550MA 0402", DC Resistance (DCR)="120 mOhm Max", Impedance @ Frequency="40 Ohm @ 100MHz", Manufacturer="TDK Corporation", Manufacturer Part Number=MMZ1005Y400CT000, Package / Case="0402 (1005 Metric)", Supplier Part Number 1=445-2150-1-ND, Category=Filters, ComponentLink1Description=http://product.tdk.com/emc/beads/en/documents/beads_commercial_signal_mmz_en.pdf, ComponentLink1URL=http://product.tdk.com/emc/beads/en/documents/beads_commercial_signal_mmz_en.pdf, Current Rating=550mA, Filter Type="Differential Mode - Single", Height (Max)="0.022\" (0.55mm)", Mounting Type="Surface Mount", Packaging="Cut Tape (CT)", Pricing 1="1=0.14, 10=0.099, 100=0.059, 250=0.04284, 500=0.03928, 1000=0.03393, 5000=0.02679 (CAD)", RoHS="RoHS Compliant", Size / Dimension="0.039\" L x 0.020\" W (1.00mm x 0.50mm)", Stock 1=1706, Supplier 1=Digi-Key
KILL_SWITCH: "Switch", LatestRevisionDate=17-Jul-2002, LatestRevisionNote="Re-released for DXP Platform.", PackageDescription="Switch; 2 Leads", PackageReference=SPST-2, Published=24-Mar-1999, Publisher="Altium Limited"
L1: library part "Ferrite_200 ohms_2A", "FILTER CHIP 220 OHM 2A 0603", Current Rating=2A, DC Resistance (DCR)="50 mOhm Max", Impedance @ Frequency="220 Ohm @ 100MHz", Manufacturer="Murata Electronics North America", Manufacturer Part Number=BLM18EG221SN1D, Package / Case="0603 (1608 Metric)", Supplier Part Number 1=490-3992-1-ND, Category=Filters, ComponentLink1Description=http://search.murata.co.jp/Ceramy/image/img/PDF/ENG/L0110S0101BLM18E.pdf, ComponentLink1URL=http://search.murata.co.jp/Ceramy/image/img/PDF/ENG/L0110S0101BLM18E.pdf, Filter Type="Differential Mode - Single", Height (Max)="0.037\" (0.95mm)", Mounting Type="Surface Mount", Packaging="Cut Tape (CT)", Pricing 1="1=0.33, 10=0.254, 50=0.1814, 100=0.1632, 250=0.13784, 500=0.12332, 1000=0.10519 (CAD)", RoHS="RoHS Compliant", Size / Dimension="0.063\" L x 0.031\" W (1.60mm x 0.80mm)", Stock 1=382631, Supplier 1=Digi-Key
P1: "Header, 5-Pin", LatestRevisionDate=17-Jul-2002, LatestRevisionNote="Re-released for DXP Platform.", Publisher="Altium Limited"
Q1: "NPN Bipolar Transistor", Code_JEDEC=TO-226-AA, LatestRevisionDate=17-Jul-2002, LatestRevisionNote="Re-released for DXP Platform.", PackageDescription="TO, Flat Index; 3 In-Line, Axial Leads; Body Dia. 4.8mm; Leads 0.55 x 0.51 mm (max)", PackageReference=TO-226-AA, Published=8-Jun-2000, Publisher="Altium Limited"
R0 R21 R22 R23 R24 R25 R26 R200 U4: "No Description Available", Copyright="Copyright (C) 2018 Accelerated Designs. All rights reserved", RefDes=RefDes, Type=DEV
  R0 R21 R22 R23 R24 R25 R26 R200: Built_By=EMA_Justin, Datasheet=https://www.vishay.com/docs/30161/wsk0612.pdf, Manufacturer_Part_Number=WSK06125L000FEA, SourceLibrary=Vishay_2020-09-02, Vendor=Vishay
  U4: Built_By=EMA_Jessica, Manufacturer_Part_Number=INA3221AQRGVRQ1, SourceLibrary=TI_2019-03-25_3, Vendor="Texas Instruments"
R1: library part 1M_5%_1206, "RES SMD 1M OHM 5% 1/4W 1206", Manufacturer="Panasonic Electronic Components", Manufacturer Part Number=ERJ-8GEYJ105V, Operating Temperature="-55°C ~ 155°C", Package / Case="1206 (3216 Metric)", Power (Watts)="0.25W, 1/4W", Supplier Device Package=1206, Supplier Part Number 1=P1.0MECT-ND, Temperature Coefficient=±200ppm/°C, Tolerance=±5%, Category=Resistors, ComponentLink1Description=http://industrial.panasonic.com/www-cgi/jvcr13pz.cgi?E+PZ+3+AOA0001+ERJ8GEYJ105V+7+WW, ComponentLink1URL=http://industrial.panasonic.com/www-cgi/jvcr13pz.cgi?E+PZ+3+AOA0001+ERJ8GEYJ105V+7+WW, Composition="Thick Film", Features="Automotive AEC-Q200", Height="0.028\" (0.70mm)", Number of Terminations=2, Packaging="Cut Tape (CT)", Pricing 1="1=0.14, 50=0.038, 100=0.029, 250=0.02152, 500=0.01588, 1000=0.01059, 2500=0.00894 (CAD)", Resistance (Ohms)=1M, RoHS="RoHS Compliant", Size / Dimension="0.126\" L x 0.063\" W (3.20mm x 1.60mm)", Stock 1=165352, Supplier 1=Digi-Key
R2 R3 R4 R5 R6 R7: library part 10k_1%_0402, "RES SMD 10K OHM 1% 1/10W 0402", Manufacturer="Panasonic Electronic Components", Manufacturer Part Number=ERJ-2RKF1002X, Operating Temperature="-55°C ~ 155°C", Package / Case="0402 (1005 Metric)", Power (Watts)="0.1W, 1/10W", Supplier Device Package=0402, Supplier Part Number 1=P10.0KLCT-ND, Temperature Coefficient=±100ppm/°C, Tolerance=±1%, Category=Resistors, ComponentLink1Description=http://industrial.panasonic.com/www-cgi/jvcr13pz.cgi?E+PZ+3+AOA0002+ERJ2RKF1002X+7+WW, ComponentLink1URL=http://industrial.panasonic.com/www-cgi/jvcr13pz.cgi?E+PZ+3+AOA0002+ERJ2RKF1002X+7+WW, Composition="Thick Film", Features="Automotive AEC-Q200", Height="0.016\" (0.40mm)", Number of Terminations=2, Packaging="Cut Tape (CT)", Pricing 1="1=0.14, 50=0.0282, 100=0.0215, 250=0.01592, 500=0.01176, 1000=0.00784, 5000=0.00551 (CAD)", Resistance (Ohms)=10k, RoHS="RoHS Compliant", Size / Dimension="0.039\" L x 0.020\" W (1.00mm x 0.50mm)", Stock 1=5818216, Supplier 1=Digi-Key
R8 R9: library part 27_1%_0402, "RES SMD 27 OHM 1% 1/10W 0402", Manufacturer="Panasonic Electronic Components", Manufacturer Part Number=ERJ-2RKF27R0X, Operating Temperature="-55°C ~ 155°C", Package / Case="0402 (1005 Metric)", Power (Watts)="0.1W, 1/10W", Supplier Device Package=0402, Supplier Part Number 1=P27.0LCT-ND, Temperature Coefficient=±100ppm/°C, Tolerance=±1%, Category=Resistors, ComponentLink1Description=http://industrial.panasonic.com/www-cgi/jvcr13pz.cgi?E+PZ+3+AOA0002+ERJ2RKF27R0X+7+WW, ComponentLink1URL=http://industrial.panasonic.com/www-cgi/jvcr13pz.cgi?E+PZ+3+AOA0002+ERJ2RKF27R0X+7+WW, Composition="Thick Film", Features="Automotive AEC-Q200", Height="0.016\" (0.40mm)", Number of Terminations=2, Packaging="Cut Tape (CT)", Pricing 1="1=0.16, 50=0.0234, 100=0.0171, 250=0.01308, 500=0.01048, 1000=0.00771, 5000=0.00553 (CAD)", Resistance (Ohms)=27, RoHS="RoHS Compliant", Size / Dimension="0.039\" L x 0.020\" W (1.00mm x 0.50mm)", Stock 1=490131, Supplier 1=Digi-Key
R11 R12 R15 R16 R17 R19: library part 10k_1%_0603, "RES SMD 10K OHM 1% 1/10W 0603", Manufacturer="Panasonic Electronic Components", Manufacturer Part Number=ERJ-3EKF1002V, Operating Temperature="-55°C ~ 155°C", Package / Case="0603 (1608 Metric)", Power (Watts)="0.1W, 1/10W", Supplier Device Package=0603, Supplier Part Number 1=P10.0KHCT-ND, Temperature Coefficient=±100ppm/°C, Tolerance=±1%, Category=Resistors, ComponentLink1Description=http://industrial.panasonic.com/www-cgi/jvcr13pz.cgi?E+PZ+3+AOA0002+ERJ3EKF1002V+7+WW, ComponentLink1URL=http://industrial.panasonic.com/www-cgi/jvcr13pz.cgi?E+PZ+3+AOA0002+ERJ3EKF1002V+7+WW, Composition="Thick Film", Features="Automotive AEC-Q200", Height="0.022\" (0.55mm)", Number of Terminations=2, Packaging="Cut Tape (CT)", Pricing 1="1=0.14, 50=0.0206, 100=0.0157, 250=0.01164, 500=0.0086, 1000=0.00574, 2500=0.00484 (CAD)", Resistance (Ohms)=10k, RoHS="RoHS Compliant", Size / Dimension="0.063\" L x 0.031\" W (1.60mm x 0.80mm)", Stock 1=7554180, Supplier 1=Digi-Key
R13 R14: library part 120_1%_0402, "RES SMD 120 OHM 1% 1/10W 0402", Manufacturer="Panasonic Electronic Components", Manufacturer Part Number=ERJ-2RKF1200X, Operating Temperature="-55°C ~ 155°C", Package / Case="0402 (1005 Metric)", Power (Watts)="0.1W, 1/10W", Supplier Device Package=0402, Supplier Part Number 1=P120LCT-ND, Temperature Coefficient=±100ppm/°C, Tolerance=±1%, Category=Resistors, ComponentLink1Description=http://industrial.panasonic.com/www-cgi/jvcr13pz.cgi?E+PZ+3+AOA0002+ERJ2RKF1200X+7+WW, ComponentLink1URL=http://industrial.panasonic.com/www-cgi/jvcr13pz.cgi?E+PZ+3+AOA0002+ERJ2RKF1200X+7+WW, Composition="Thick Film", Features="Automotive AEC-Q200", Height="0.016\" (0.40mm)", Number of Terminations=2, Packaging="Cut Tape (CT)", Pricing 1="1=0.14, 50=0.0282, 100=0.0215, 250=0.01592, 500=0.01176, 1000=0.00784, 5000=0.00551 (CAD)", Resistance (Ohms)=120, RoHS="RoHS Compliant", Size / Dimension="0.039\" L x 0.020\" W (1.00mm x 0.50mm)", Stock 1=184236, Supplier 1=Digi-Key
"Relay A" "Relay B": library part Relay-SPST, "Single-Pole Single-Throw Relay", LatestRevisionDate=17-Jul-2002, LatestRevisionNote="Re-released for DXP Platform.", PackageReference=MODULE4, Published=24-Mar-1999, Publisher="Altium Limited"
U1: "500 mA, Low Voltage, Low Quiescent Current LDO Regulator", Current - Limit (Min)=-, Current - Output=500mA, Manufacturer="Microchip Technology", Operating Temperature="-40°C ~ 125°C", Package / Case="TO-261-4, TO-261AA", Supplier Device Package=SOT-223-3, Supplier Part Number 1=MCP1825S-3302E/DB-ND, Voltage - Dropout (Typical)="0.21V @ 500mA", Voltage - Input="Up to 6V", Voltage - Output=3.3V, Category="Integrated Circuits (ICs)", ComponentLink1Description=http://www.microchip.com/mymicrochip/filehandler.aspx?ddocname=en531698, ComponentLink1URL=http://www.microchip.com/mymicrochip/filehandler.aspx?ddocname=en531698, Manufacturer Part Number=MCP1825S-3302E/DB, Mounting Type="Surface Mount", Number of Regulators=1, Packaging=Tube, Pricing 1="1=0.61, 10=0.51, 25=0.43, 100=0.39 (USD)", Regulator Topology="Positive Fixed", RoHS="RoHS Compliant", Stock 1=5172, Supplier 1=Digi-Key
U2: "Tiva TM4C123GH6PM Microcontroller ARM Cortex 80 MHz FPU", Supplier Part Number 1=296-35848-ND, Supplier 1=Digi-Key
U3: library part FT230XQ-R, "IC USB SERIAL BASIC UART 16QFN", Current - Supply=8mA, Manufacturer="FTDI, Future Technology Devices International Ltd", Operating Temperature="-40°C ~ 85°C", Package / Case="16-WQFN Exposed Pad", Supplier Device Package="16-QFN (4x4)", Supplier Part Number 1=768-1130-1-ND, Voltage - Supply="3.3 V ~ 5 V", Category="Integrated Circuits (ICs)", ComponentLink1Description=http://www.ftdichip.com/Support/Documents/DataSheets/ICs/DS_FT230X.pdf, ComponentLink1URL=http://www.ftdichip.com/Support/Documents/DataSheets/ICs/DS_FT230X.pdf, Function="Bridge, USB to UART", Interface=UART, Manufacturer Part Number=FT230XQ-R, Packaging="Cut Tape (CT)", Pricing 1="1=2.64, 25=2.5508, 100=2.4601, 250=2.21412, 500=1.994, 1000=1.89042, 2500=1.86128 (CAD)", Protocol=USB, RoHS="RoHS Compliant", Standards="USB 2.0", Stock 1=7567, Supplier 1=Digi-Key
USB1: library part "MOLEX 0670688010", Supplier Part Number 1=WM4064-ND, Supplier 1=Digi-Key
X1: library part 403C35E16M00000, "CRYSTAL 16MHZ 20PF SMD", ESR (Equivalent Series Resistance)="80 Ohm", Frequency=16MHz, Frequency Stability=±50ppm, Frequency Tolerance=±30ppm, Load Capacitance=20pF, Manufacturer="CTS-Frequency Controls", Operating Mode=Fundamental, Operating Temperature="-20°C ~ 70°C", Package / Case="4-SMD, No Lead (DFN, LCC)", Ratings=-, Supplier Part Number 1=CTX1293CT-ND, Category="Crystals and Oscillators", ComponentLink1Description=http://www.ctscorp.com/components/Datasheets/008-0288-0_F.pdf, ComponentLink1URL=http://www.ctscorp.com/components/Datasheets/008-0288-0_F.pdf, Height="0.031\" (0.80mm)", Manufacturer Part Number=403C35E16M00000, Mounting Type="Surface Mount", Packaging="Cut Tape (CT)", Pricing 1="1=1.07, 10=0.95, 50=0.8866, 100=0.7847, 500=0.7415, 750=0.70228, 1000=0.61988 (CAD)", RoHS="RoHS Compliant", Size / Dimension="0.126\" L x 0.098\" W (3.20mm x 2.50mm)", Stock 1=7029, Supplier 1=Digi-Key, Type="MHz Crystal"
?: library part Res1, "Resistor", LatestRevisionDate=17-Jul-2002, LatestRevisionNote="Re-released for DXP Platform.", PackageDescription="Axial Device, Thru-Hole; 2 Leads; 0.3 in Pin Spacing", PackageReference=AXIAL-0.3, Published=8-Jun-2000, Publisher="Altium Limited"

## Via types
v1: diameter 50, hole 28, Top Layer to PWR Plane, 100 vias
v2: diameter 50, hole 28, Top Layer to Bottom Layer, 35 vias
v3: diameter 50, hole 28, Top Layer to GND Plane, 15 vias

## Nets (pads, with @x,y where several pads share a name; then routed paths per layer and width w, separated by ;. In a path a pad name is that pad's centre, name@x,y a point inside that pad or via, vN(x,y) a via of type N, cw(c..) or ccw(c..) an arc to the next point about the centre after c; other vN are vias at no path point)
12V: "From Regulator.2" F8.1 F9.1
+3.3V: C10.1 C11.1 C12.1 C13.2 C14.2 C15.2 C16.2 C17.2 C20.2 C28.2 C29.2 F1.1 R2.1 R3.1 R4.2 R5.2 R6.2 R7.2 R13.2 R14.2 U1.3 U2.11 U2.26 U2.37 U2.42 U2.54 U3.1 U3.8 U3.9 U3.10 | length 3743.7
  Top Layer w10: v2(4346.73,5190) 4354.45,5182.28 F1.1 ; C28.2 4850,5903.11 C29.2 v1(5790,5903.11) 5790,5677.83 C10.1 5548.74,5436.57 U1.3 U1.3@5404.73,5434.73 ; 5825,6360 R13.2 ; v2(5950,6400) 5950,6338.82 R6.2 5942.72,6305 R4.2 5907.72,6266.73 R5.2 R7.2 ; v2@5962.72,6413.78 5973.23,6424.29 U3.1 ; C11.1@5972.16,6745 5982.16,6755 6032.44,6755 6042.44,6745 6042.44,6722.56 6075,6690 ; v1(6024.41,5655) 6024.41,5636.65 6116.69,5544.37 U2.11 ; U3.10 U3.9 ; U3.8 U3.9 ; v2(6130,6690) 6075,6690 ; v2(6280,6389.8) 6313.9,6389.8 R14.2 ; R2.1@6350,5954.72 R2.1 6397.28,5957.28 6405,5965 v1(6415,5965) 6424.72,5955.28 U2.54 ; U2.26 6405.04,5329.96 6465,5270 v3(6550,5270) ; U2.37@6608.11,5523.9 6801.85,5523.9 6832.32,5493.42 R3.1 6859.21,5487.32 v3(6859.21,5425) ; U2.42@6608.11,5622.32 6656.71,5622.32 v1(6694.39,5660) ; U3.9 6050,6665 6075,6690
+5V: C4.2 C5.2 C6.2 C7.1 C8.1 C9.2 C30.2 L1.2 R11.1 R12.1 R15.1 R16.1 R17.1 R19.1 U1.1 U4.4 U4.16 | length 3912.2
  Top Layer w10: L1.2 4837.44,5675 4561.89,5675 4500,5613.11 4500,5533.42 4541.89,5491.53 C7.1 4770,5491.53 C8.1 4776.1,5495.43 4815.43,5495.43 4849.53,5529.53 4935,5529.53 4935,5520 5018.43,5436.57 U1.1 5223.62,5061.38 5298.11,4986.89 C4.2 C5.2 C6.2 ; U4.4 5649.89,4685.11 5485,4850 C6.2 ; U4.16 5810,4515.3 5810,4957.67 R16.1 ; R17.1 R15.1 R19.1 R16.1 ; C6.2 5537.34,4986.89 R12.1 R11.1 R16.1
+A3.3V: C21.2 C22.2 C23.2 F1.2 U2.2 | length 2064.5
  Top Layer w10: F1.2 4559.68,5217.72 C21.2 C22.2 4949.67,5217.12 C23.2@4952.68,5220.12 ; C23.2 C23.2@4952.68,5220.12 ; v2(5075,5235) 5060.12,5220.12 C23.2@4952.68,5220.12 ; v2(6075,5866.89) 6075,5802.56 U2.2
  Bottom Layer w10: v2(5075,5235) 5315,5235 5946.89,5866.89 v2(6075,5866.89)
"CPU Connector": CPU.2 F8.2
"CPU Controlled Switch": ?.2 Q1.2 | length 1707.7
  Bottom Layer w10: Q1.2 2710,4760 ?.2
CRITICAL: R17.2 U2.22 U4.9 | length 1799.8
  Top Layer w10: v2(5620,4275) 5649.89,4304.89 U4.9 ; R17.2 6264.49,5187.24 6326.3,5249.06 U2.22
  Bottom Layer w10: v2(5620,4275) 5795,4450 5795,4980 6005,5190 6250,5190 v2(6265,5175)
DM: R8.1 USB1.2 | length 169.2
  Top Layer w10: R8.1 6634.53,6467.72 USB1.2 USB1.2@6694.39,6419.7
DP: R9.1 USB1.3 | length 236.3
  Top Layer w10: R9.1 6721.15,6367.72 USB1.3
GND: "From Regulator.1" "To Regulator.1" ANTENNA.1 ARM.1 AUTONOMY.1 Battery_Connector.1 C1.2 C2.1 C3.1 C4.1 C5.1 C6.1 C7.2 C8.2 C9.1 C10.2 C11.2 C12.2 C13.1 C14.1 C15.1 C16.1 C17.1 C18.1 C19.1 C20.1 C21.1 C22.1 C23.1 C24.1 C25.1 C26.1 C27.1 C28.1 C29.1 C30.1 CPU.1 Drive.1 KILL_SWITCH.2 P1.1 Q1.3 R1.1 Science.1 U1.2 U1.4 U2.3 U2.12 U2.27 U2.32 U2.34 U2.35 U2.39 U2.55 U3.3 U3.13 U3.17 U4.3 U4.5 USB1.4 X1.2 X1.4 | length 7333.2
  Top Layer w10: C21.1 C22.1 4893.12,5180.9 4909.01,5165 C23.1 4995,5165 5010,5150 v3(5050,5150) ; C7.2@4605,5600.86 C8.2 4810,5600.86 4823.3,5587.56 C30.1 4912.44,5587.56 4934.63,5565.37 5034.63,5665.37 5035.11,5664.89 5115.01,5664.89 U1.4 5545.83,5664.92 C10.2@5615,5595.75 ; v3(4833.95,5795) 4833.95,5790.84 4910,5866.89 ; C28.1 4850,5866.89 4910,5866.89 ; C4.1 C5.1 ; U1.2@5320,5430.75 U1.2 5314.17,5320.83 v3(5315,5320) 5315,5110.57 C5.1 ; v3(5470,4750) 5470,4550 5551.61,4468.39 U4.5 ; C6.1@5483.11,5021.22 C6.1 C5.1 ; C10.2 5610,5756.71 5648.29,5795 5648.29,5866.5 C17.1 C14.1 C13.1 4910,5866.89 ; U4.3 5675.48,4568.82 v3(5726.66,4620) ; v3(5765,6728.7) 5808.7,6728.7 5825,6745 C11.2@5867.83,6745 ; U3.13 5973.23,6608.19 6011.61,6569.8 6024.41,6557.01 U3.3 ; v3(6025,5760) 6025,5744.01 6067.16,5701.85 U2.3 ; v3(6031.01,5540) 6045,5540 6060.31,5524.69 U2.12 ; C12.2@6097.56,6745 6107.56,6755 6150,6755 6200,6705 v3(6220,6705) ; P1.1 6313.9,6083.9 6313.9,5941.1 6405.04,5849.96 U2.55 ; U2.27 6424.72,5340.28 6440,5325 6516.73,5325 6565.83,5374.09 ; U2.32 6565.83,5374.09 ; U2.34@6608.11,5464.84 6647.71,5464.84 v2@6655.9,5473.03 ; U2.35@6608.11,5484.53 6644.41,5484.53 v2@6655.9,5473.03 ; U2.39@6608.11,5563.27 6970,5563.27 v2(7040.63,5492.64) C27.1 ; C25.1 6628.11,5041.93 C26.1 6803.78,5033.15 C24.1 7113.15,5033.15 v3(7135,5055) ; v3(6685,6080) 6740,6025 R1.1 ; C19.1 6963.5,5763.86 X1.2 ; X1.4 6952.01,5649.37 X1.2 ; C2.1 7166.1,6025 v3(7235,6093.9) ; v3(7209.8,5681.97) C18.1 7079.61,5712.36 X1.2 ; 6565.83,5374.09 v2(6665,5473.27) v2@6655.9,5473.03
IN+1: Battery_Connector.2 R0.1 R0.2 R21.1 R21.2 R22.1 R22.2 R23.1 R23.2 R24.1 R24.2 R25.1 R25.2 R26.1 R26.2 R200.1 R200.2 U4.12 U4.15 | length 2085.7
  Top Layer w10: U4.12 5811.86,4270 5960,4270 6090,4400 5955,4535 5892.72,4535 5800.51,4442.8 U4.15
  Bottom Layer w10: v2(5660,3185) 5955,3480 v2(5955,4275)
  other v1: 3758.53,2750 3429.21,2760 3565,2760 3953.53,2760 745,2765 880.79,2765 1016.58,2765 1152.37,2765 1288.16,2765 1423.95,2765 1559.74,2765 1695.53,2765 1831.32,2765 1967.1,2765 2102.89,2765 2238.68,2765 2374.47,2765 2510.26,2765 2646.05,2765 2781.84,2765 2917.63,2765 3053.42,2765 3189.21,2765 3325,2765 6839.21,2765 6975,2765 4155,2770 4290.79,2770 4426.58,2770 4562.37,2770 4698.16,2770 4833.95,2770 4969.74,2770 5105.53,2770 5241.32,2770 5377.1,2770 5512.89,2770 5648.68,2770 5784.47,2770 5920.26,2770 6056.05,2770 6191.84,2770 6327.63,2770 6463.42,2770 6599.21,2770 6735,2770 3590,2895 753.53,2905 6995,2915 4135,2935 3605,3035 758.53,3045 6859.21,3075 6995,3075 4175,3080 4310.79,3080 4446.58,3080 4582.37,3080 4718.16,3080 4853.95,3080 4989.74,3080 5125.53,3080 5261.32,3080 5397.11,3080 5532.9,3080 5668.68,3080 5804.47,3080 5940.26,3080 6076.05,3080 6211.84,3080 6347.63,3080 6483.42,3080 6619.21,3080 6755,3080 1335,3090 1470,3090 2115,3095 2675,3095 2830,3095 895,3105 1050,3105 1995,3106.54 3464.21,3175 3600,3175 780,3180 1187.37,3180 1594.74,3180 1730.53,3180 1866.32,3180 2273.68,3180 2409.47,3180 2545.26,3180 2952.63,3180 3088.42,3180 3224.21,3180 3360,3180
IN-1: "Relay A.1" "Relay A.3" D3.2 R0.3 R0.4 R21.3 R21.4 R22.3 R22.4 R23.3 R23.4 R24.3 R24.4 U4.11 | length 2346.5
  Top Layer w10: U4.11 5701.07,4293.93 v2(5725,4270)
  Bottom Layer w10: v2(3660,3825) 3845,4010 3990,4010 D3.2 ; D3.2@4120,4135 5590,4135 v2(5725,4270)
IN-2: "To Regulator.2" R25.3 R25.4 R26.3 R26.4 R200.3 R200.4 U4.14 | length 799.6
  Top Layer w10: U4.14 5834.41,4417.21 5860,4442.8 v2(5867.8,4435)
  Bottom Layer w10: v2(5805,3780) 5867.8,3842.8 v2(5867.8,4435)
Net_1: ?.1 U2.61 | length 2240.6
  Top Layer w10: v2(6241.62,5903.11) 6285,5859.73 6285,5815 U2.61
  Bottom Layer w10: ?.1 5020,4760 5970,5710 6048.51,5710 v2(6241.62,5903.11)
NetANTENNA_2: ANTENNA.2 F4.2
NetARM_2: ARM.2 F3.2
NetAUTONOMY_2: AUTONOMY.2 F7.2
NetD1_1: D1.1 R13.1 | length 89.8
  Top Layer w10: R13.1 5827.17,6452.17 D1.1
NetD2_1: D2.1 R14.1 | length 252.4
  Top Layer w10: D2.1 6285,6203.19 6399.33,6317.52 R14.1
NetD3_1: "Relay A.4" D3.1 KILL_SWITCH.1 | length 3057.2
  Bottom Layer w10: KILL_SWITCH.1 2120,3925 2330,4135 D3.1@3840.24,4135
NetD4_1: "Relay B.4" D4.1 Q1.1 | length 630.1
  Bottom Layer w10: 2335,5100 2335,5010 2540,4805 Q1.1 D4.1
NetDrive_2: Drive.2 F0.2
NetR6_1: R6.1 U3.16 | length 212.1
  Top Layer w10: R6.1 5907.28,6501.89 U3.16
NetR7_1: R7.1 U3.4 | length 275
  Top Layer w10: R7.1@6050,6220 U3.4
NetR8_2: R8.2 U3.7 | length 525.8
  Top Layer w10: U3.7 6241.62,6582.6 6391.93,6432.28 R8.2
NetR9_2: R9.2 U3.6 | length 556.7
  Top Layer w10: U3.6 6237.99,6557.01 6462.72,6332.28 R9.2
OSC0: C18.2 U2.40 X1.1 | length 542.5
  Top Layer w10: U2.40@6608.11,5582.95 6997.2,5582.95 7015,5600.75 X1.1 7090,5625.75 C18.2
OSC1: C19.2 U2.41 X1.3 | length 400.4
  Top Layer w10: U2.41@6608.11,5602.64 6730,5602.64 6853.11,5725.75 6855,5725.75 6938.62,5725.75 X1.3
PV: R19.2 U2.20 U4.10 | length 1788.5
  Top Layer w10: U4.10 5675.48,4244.52 5745,4175 5770,4200 v2(5811.86,4200) ; R19.2 5976.38,5047.68 5970,5054.06 v2(5970,5090) 6122.23,5242.23 6217.23,5242.23 6286.93,5311.93 U2.20
  Bottom Layer w10: v2(5811.86,4200) 5820,4191.86 5820,4930 5970,5080 v2(5970,5090)
RELAY_A: "Relay A.2" "Relay B.1" "Relay B.3" D4.2
RELAY_B: "Relay B.2" F0.1 F3.1 F4.1 F7.1
RESET: C27.2 R3.2 U2.38 | length 358
  Top Layer w10: U2.38@6608.11,5543.58 6815,5543.58 6829.72,5528.86 R3.2 C27.2
"Science Connector": F9.2 Science.2
SCL: R11.2 U2.47 U4.6 | length 2617.1
  Top Layer w10: v2(5380,4685) 5380,4595 5532.2,4442.8 U4.6 ; R11.2 5688.28,5063.28 v2(5735,5110) ; U2.47@6608.11,5720.75 6728.54,5720.75 6775,5767.2 v2(6775,5800)
  Bottom Layer w10: v2(5380,4685) 5380,4775 5715,5110 v2(5735,5110) 5825,5200 5880,5200 6375,5695 6680,5695 6775,5790 v2(6775,5800)
SDA: R12.2 U2.48 U4.7 | length 2563.1
  Top Layer w10: v2(5310,4760) 5310,4620 5512.79,4417.21 U4.7 ; R12.2 5544.23,5079.23 v2(5575,5110) ; U2.48@6608.11,5740.43 6655.9,5740.43 v2(6690,5774.53)
  Bottom Layer w10: v2(5310,4760) 5310,4780 5575,5045 v2(5575,5110) 5725,5260 5850,5260 6364.53,5774.53 v2(6690,5774.53)
SHIELD: C2.2 R1.2 USB1.5 USB1.6 | length 800.1
  Top Layer w10: USB1.6 USB1.5 ; USB1.6@6910,6205.75 6910,6201.73 7017.84,6093.9 C2.2 R1.2
TC: R15.2 U2.21 U4.13 | length 1361.9
  Top Layer w10: U4.13 5911.61,4391.61 v2(5960,4440) ; R15.2 v2(6120.44,5100.44) 6306.61,5286.61 U2.21
  Bottom Layer w10: v2(5960,4440) 5960,4875 6056.05,4971.05 6056.05,5036.05 v2(6120.44,5100.44)
TCK: P1.2 R2.2 U2.52 | length 421.5
  Top Layer w10: R2.2 6350,6060 6370,6080 P1.2 6464.09,5995.91 U2.52
TDI: P1.4 U2.50 | length 381.3
  Top Layer w10: U2.50 6503.46,5863.46 6595,5955 v2(6595,5990)
  Bottom Layer w10: P1.4 6570,5990 v2(6595,5990)
TDO: P1.3 U2.49 | length 411.6
  Top Layer w10: U2.49 6618.19,5908.11 v2(6620,5908.11)
  Bottom Layer w10: P1.3 6601.89,5908.11 v2(6620,5908.11)
TMS: P1.5 U2.51 | length 291.9
  Top Layer w10: U2.51 6483.78,5883.78 6520,5920 P1.5
"USB RX LED": D2.2 U3.5 | length 313
  Top Layer w10: U3.5 6116.14,6531.42 6216.61,6430.95 D2.2
"USB TX LED": D1.2 U3.11 | length 222.8
  Top Layer w10: D1.2 5886.69,6685 5975,6685 5998.82,6661.18 U3.11
USB_RX: R4.1 U2.17 U3.15 | length 1442.5
  Top Layer w10: R4.1 5942.72,6199.57 5942.72,5531.02 6099.65,5374.09 U2.17 ; R4.1@5875,6270 5875,6515 5917.01,6557.01 U3.15
USB_TX: R5.1 U2.18 U3.2 | length 1573.6
  Top Layer w10: v2(5890,6165) 5890,5510 6075,5325 6227.87,5325 6247.56,5344.68 U2.18 ; R5.1 5998.82,6244.37 v2(5998.82,6300) U3.2@5998.82,6482.64
  Bottom Layer w10: v2@5890,6160 v2(5890,6165) 5890,6191.18 v2(5998.82,6300)
VBUS: C1.1 C3.2 L1.1 USB1.1 | length 2998.4
  Top Layer w10: L1.1 5007.56,5740 v2(5548.78,5740) C3.2 ; v2(6640,6770) 6525,6655 C1.1 6617.8,6512.2 USB1.1
  Bottom Layer w10: v2(5548.78,5740) 5765,5740 6170,6145 6585,6145 6640,6200 v2(6640,6770)
VCORE: C24.2 C25.2 C26.2 U2.25 U2.56 | length 1206.6
  Top Layer w10: U2.56 U2.25 6385.35,5320.91 C25.2 6791.89,5081.26 C26.2 6954.88,5078.15 6965,5088.27 C24.2
WARNING: R16.2 U2.19 U4.8 | length 1686
  Top Layer w10: v2@5460,4371.61 v2(5463.39,4375) 5480,4391.61 U4.8 ; R16.2 v2(5832.33,5102.33) 6010,5280 6220,5280 6267.24,5327.24 U2.19
  Bottom Layer w10: v2(5463.39,4375) 5463.39,4568.39 5765,4870 5765,5035 v2(5832.33,5102.33)